# Altium PCB rev4mixer.PcbDoc
Units mm, origin at the board's own origin, x right, y up, seen from the top; angles counter-clockwise.
Board outline 35.05 x 30.1 mm, 2 copper layers (Top Layer, Bottom Layer), stack 0.53 mm thick; 13 components, 13 nets, 74 pads, 35 vias.
Unrouted connection lines stored in the file: 1.
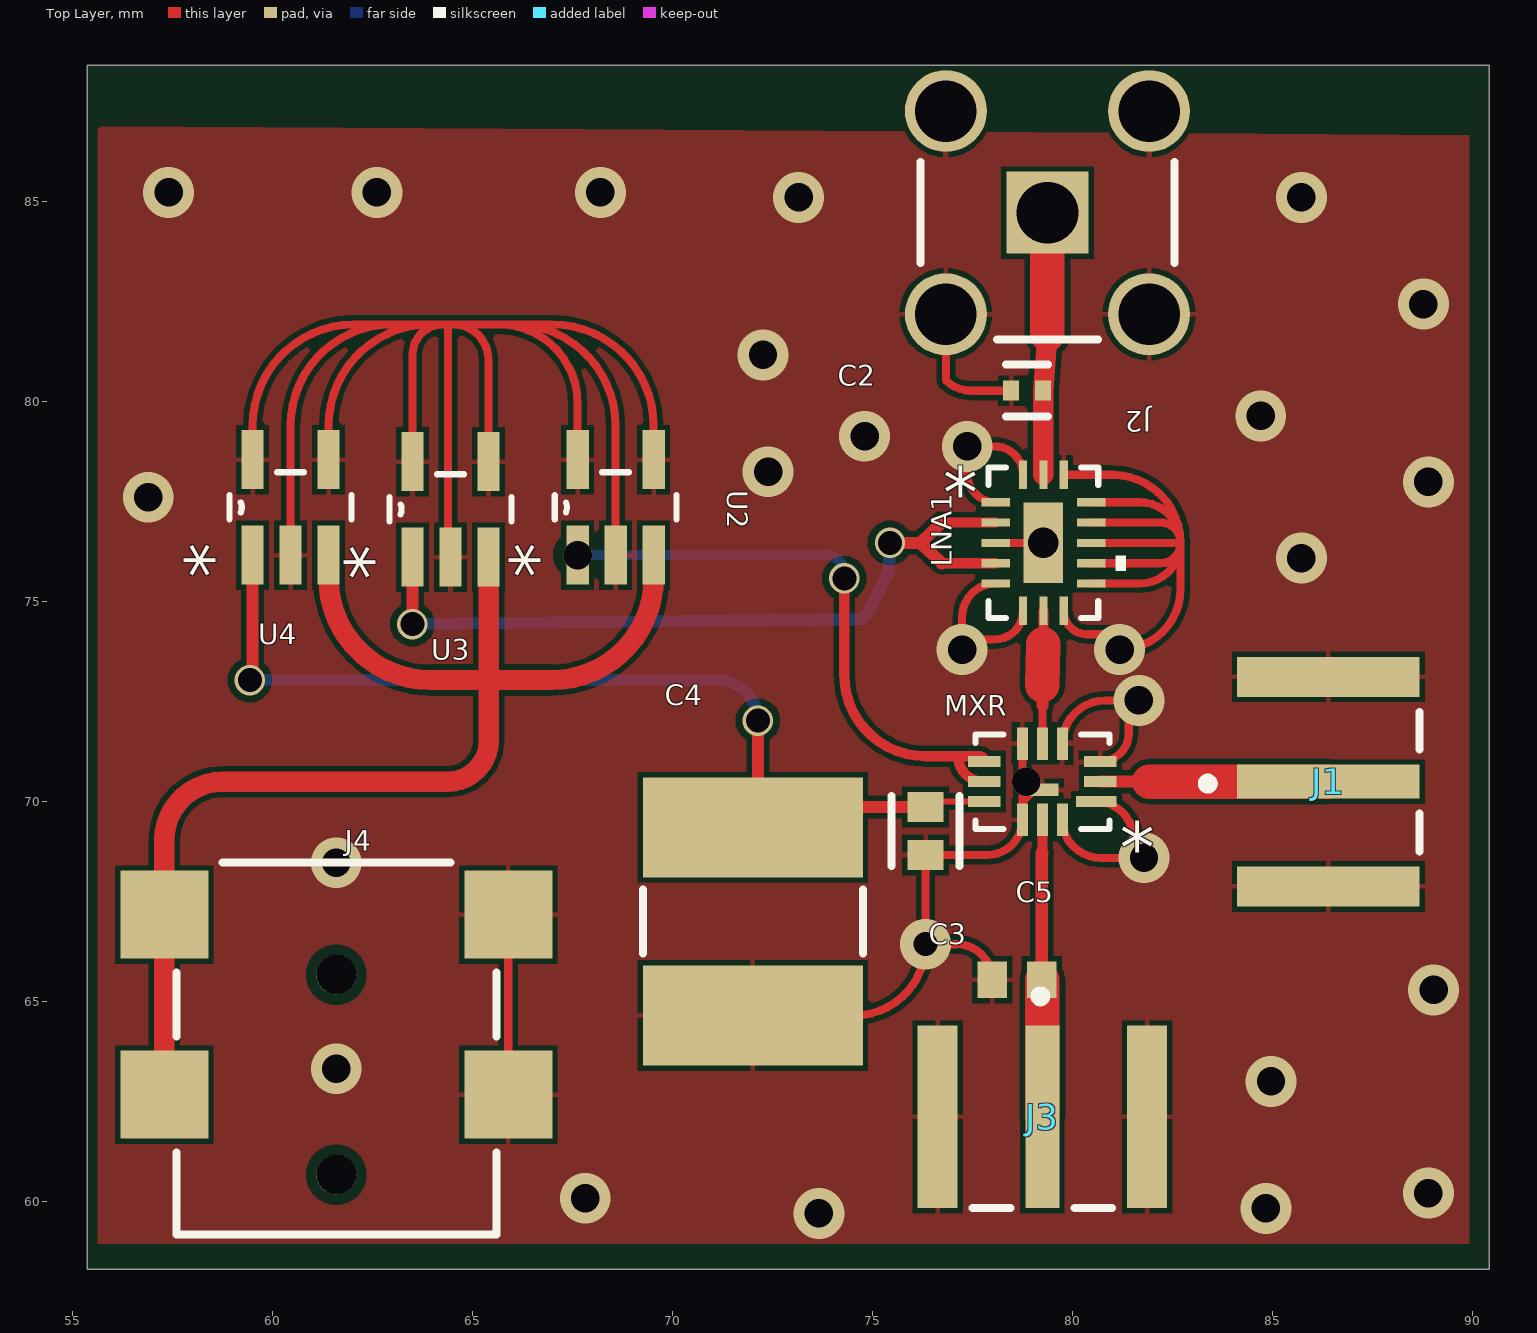
[diagram p0: Top Layer view]
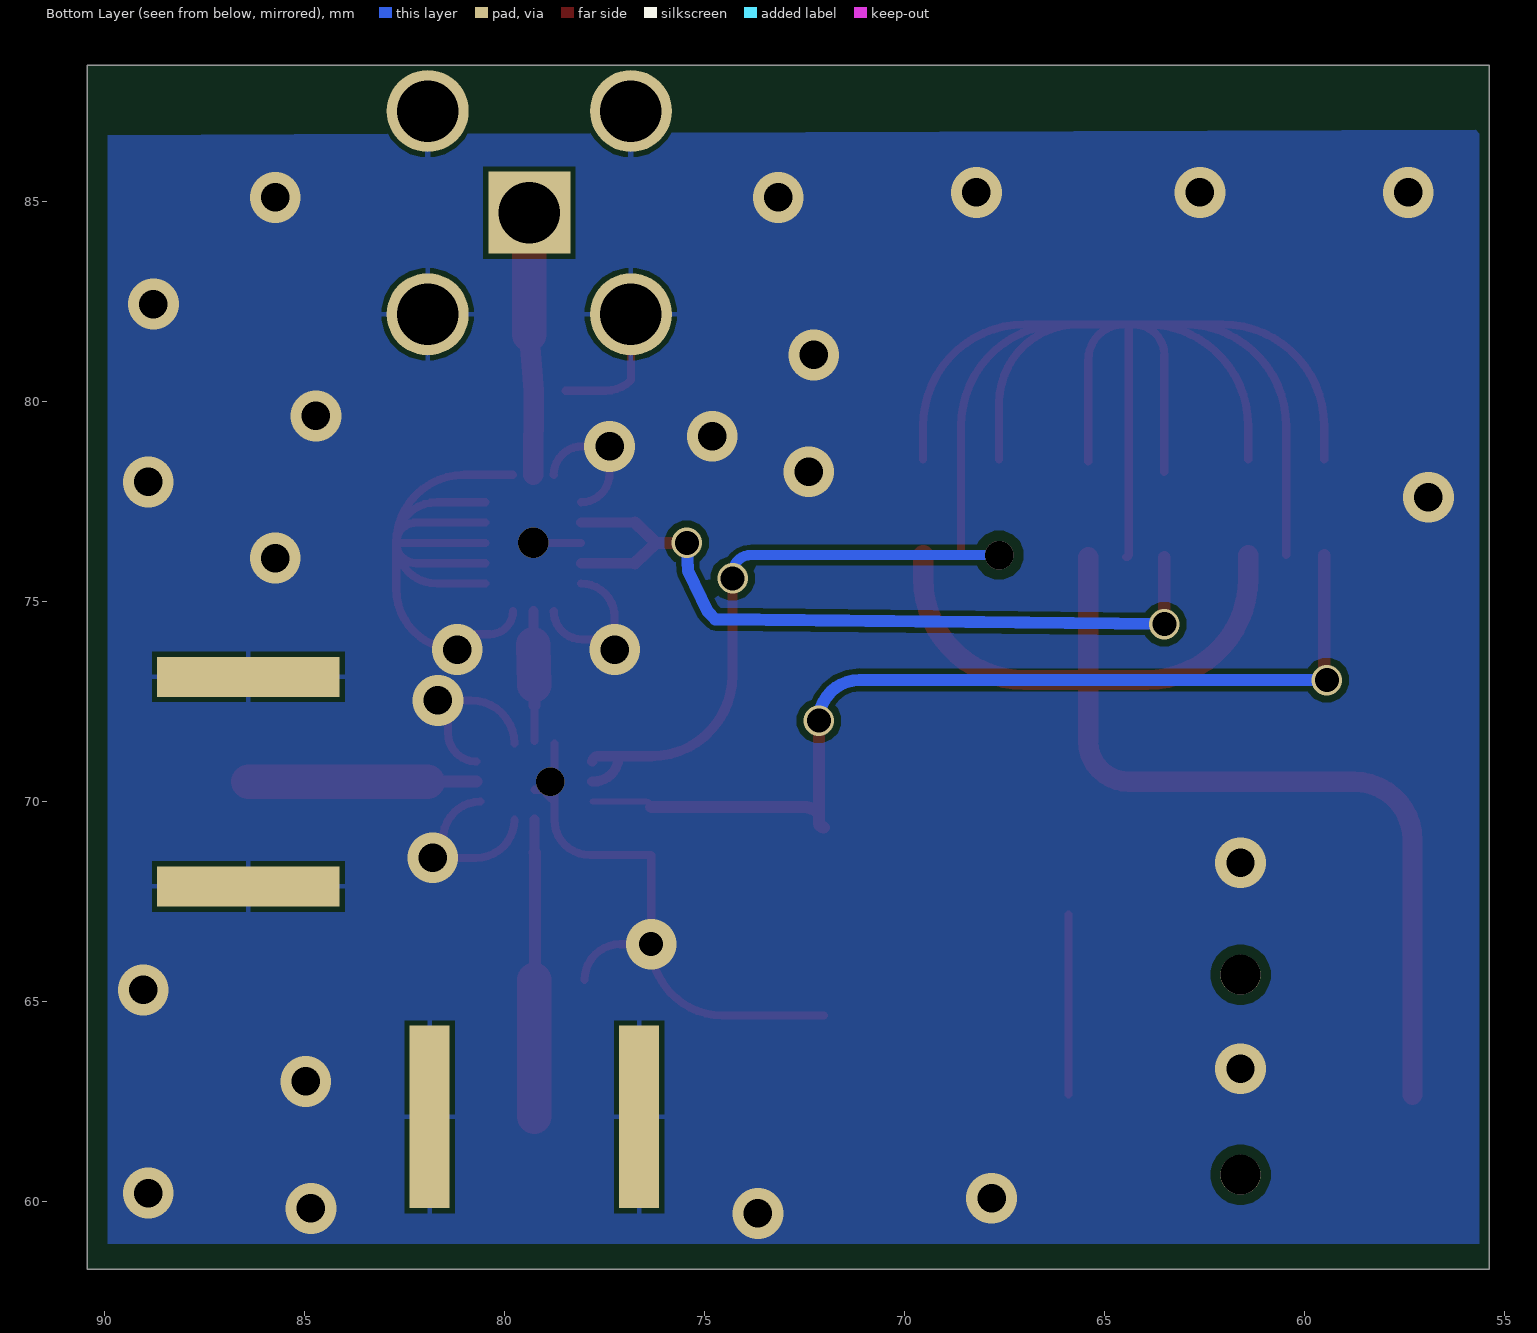
[diagram p1: Bottom Layer view, seen from below]
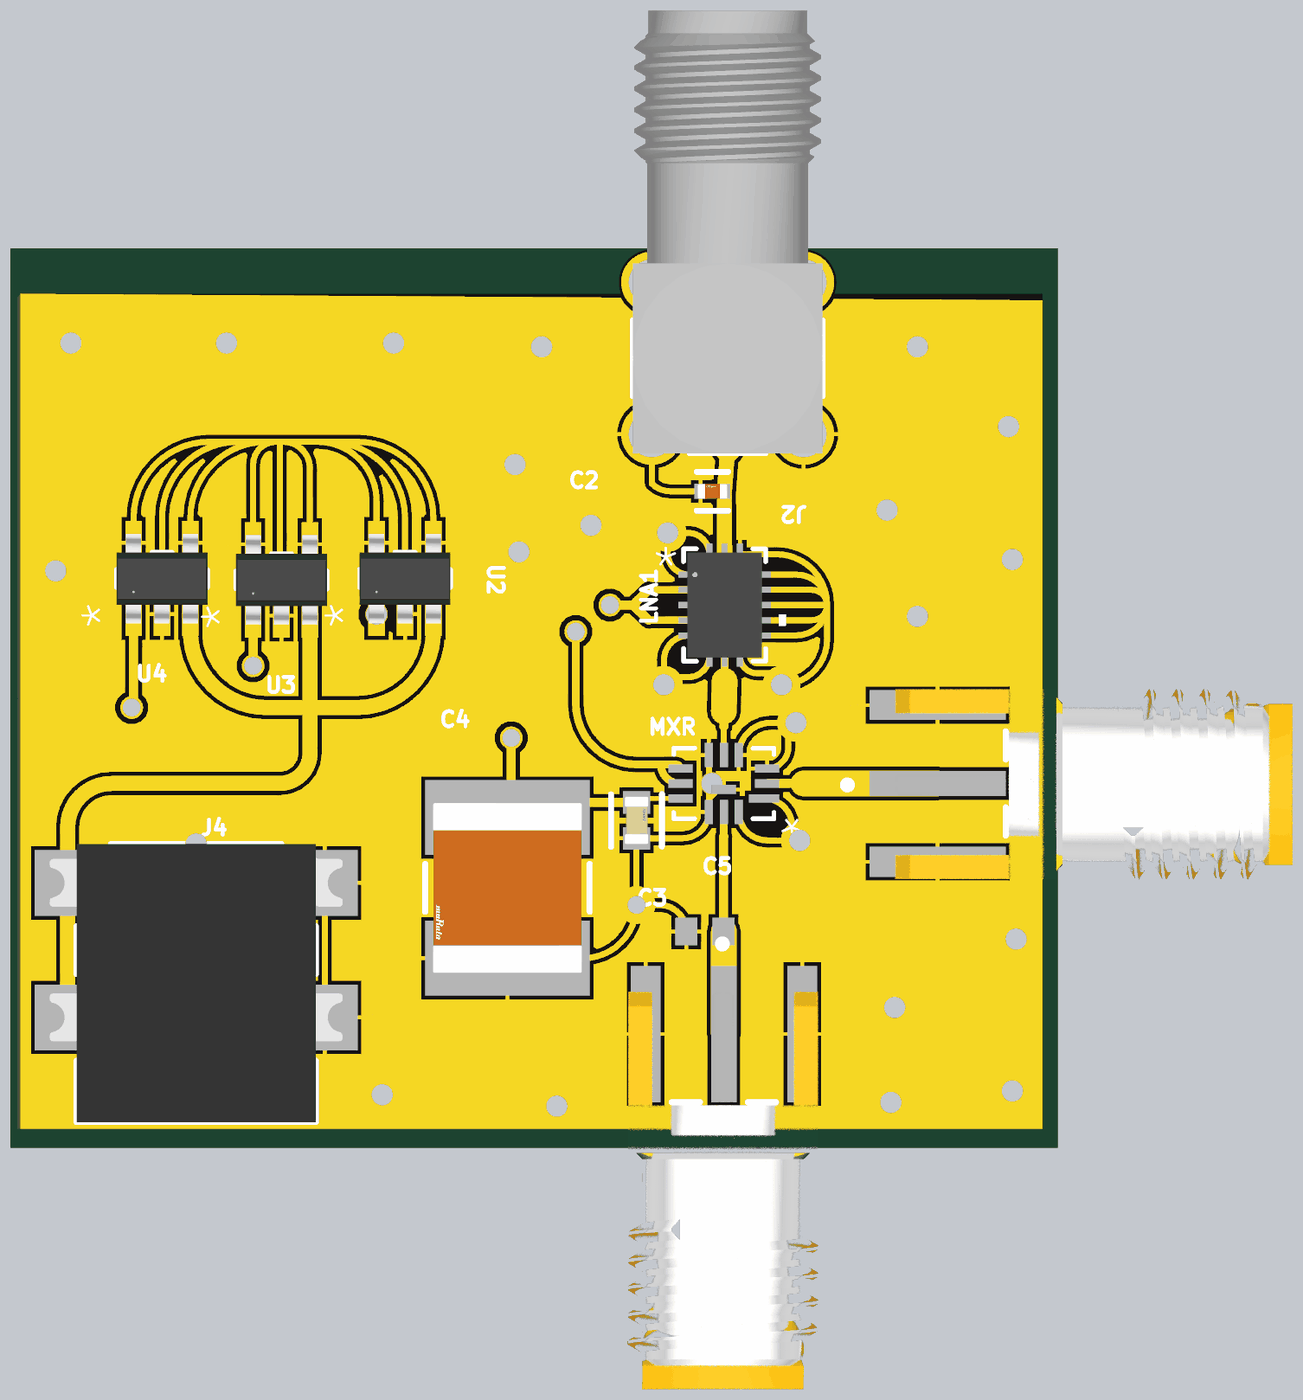
[diagram p2: 3D render of the assembled board from above, using the file's embedded part models]

## Layer stack, top to bottom
Top Solder: solder mask 0.0102, Solder Resist, Dk 3.5
Top Layer: signal copper 0.0152
Dielectric 1: core 0.4999, FR-4, Dk 4.8
Bottom Layer: signal copper 0.0152
Bottom Solder: solder mask 0.0102, Solder Resist, Dk 3.5

## Board outline
55.372,58.293 90.424,58.293 90.424,88.392 55.372,88.392

## Design rules (kind name [scope] priority, off if disabled: settings)
BoardOutlineClearance [All] p1: gap=0.2 ignorepadtopadclearanceinfootprint=FALSE
Clearance [All] p1: gap=0.127 ignorepadtopadclearanceinfootprint=FALSE except(0.25: Arc-Hole Track-Hole SMDPad-Hole THPad-Hole Via-Hole Fill-Hole Poly-Hole Region-Hole Text-Hole)
ComponentClearance [All] p1: gap=0.127 collisioncheckmode=3 verticalgap=0.127 showdistances=TRUE
DiffPairsRouting [All] p1: maxlimit=0.254 minlimit=0.127 mostfreqgap=0.127 toplayer_minwidth=0.127 toplayer_maxwidth=25.4 toplayer_prefwidth=0.127 bottomlayer_minwidth=0.127 bottomlayer_maxwidth=25.4 bottomlayer_prefwidth=0.127 maxuncoupledlength=12.7
Height [All] p1: minheight=0 maxheight=1816.048 prefheight=12.7
HoleSize [All] p1: absolutevalues=TRUE maxlimit=6.3 minlimit=0.3 maxpercent=80.000 minpercent=20.000
HoleToHoleClearance [All] p1: gap=0.25 allowstackedmicrovias=FALSE
MinimumAnnularRing [All] p1: minimumring=0.076
MinimumSolderMaskSliver [All] p1: minsoldermaskwidth=0
PlaneClearance [All] p1: clearance=0.127
PlaneConnect PlaneConnectPowerPads [InPadClass('PowerPads')] p1: planeconnectstyle=Direct reliefexpansion=0.508 reliefentries=4 reliefconductorwidth=0.254 reliefairgap=0.254
PlaneConnect [All] p2: pad.planeconnectstyle=Relief pad.reliefexpansion=0.3 pad.reliefentries=4 pad.reliefconductorwidth=0.127 pad.reliefairgap=0.127 via.planeconnectstyle=Direct via.reliefexpansion=0.3 via.reliefentries=4 via.reliefconductorwidth=0.127 via.reliefairgap=0.127
PolygonConnect PolygonConnectPowerPads [All vs (InPadClass('PowerPads'))] p1: connectstyle=Direct reliefconductorwidth=0.254 reliefentries=4 polygonreliefangle="90 Angle" airgapwidth=0.254
PolygonConnect [All] p2: thpad.connectstyle=Relief thpad.reliefconductorwidth=0.127 thpad.reliefentries=4 thpad.polygonreliefangle="90 Angle" thpad.airgapwidth=0.127 smdpad.connectstyle=Relief smdpad.reliefconductorwidth=0.127 smdpad.reliefentries=4 smdpad.polygonreliefangle="90 Angle" smdpad.airgapwidth=0.127 via.connectstyle=Direct via.reliefconductorwidth=0.127 via.reliefentries=4 via.polygonreliefangle="90 Angle" via.airgapwidth=0.127
RoutingVias [All] p1: holewidth=0.3 width=0.6 viastyle="Through Hole" minholewidth=0.3 minwidth=0.6 maxholewidth=0.6 maxwidth=6.6
SilkToSilkClearance [All] p1: silktosilkclearance=0
SilkToSolderMaskClearance [IsPad] p1: minsilkscreentomaskgap=0.127 clearancetoexposedcopper=TRUE
SolderMaskExpansion [All] p1: expansion=0.075 istentingtop=FALSE
Width [All] p1: maxlimit=25.4 minlimit=0.127 preferedwidth=0.127 minimp=50.000000 maximp=50.000000 favimp=50.000000
20 further rules are at their usual default settings.

## Classes and differential pairs
component class LNBF: C2 C3 C4 C5 J1 J2 J3 J4 LNA1 MXR

## Components (designator, comment, footprint, x,y, rotation, side; value= is the part's Value field where it differs from the comment)
C2 "GCQ1555C1HR15BB01D" FP-GCQ155-0_05-MFG 78.867,80.258 r180 top
C3 "C0603C220J5GACTU" FP-C0603C-CF-MFG 76.327,69.25 r270 top value="22 pF"
C4 "GRM55DR72E105KW01L" FP-GRM55D-0_4-IPC_A 72.009,66.992 r270 top
C5 "06032U150GAT2A" CAPC1508X91X25LL25T13 78.613,65.532 r0 top
J1 "OUT" FP-EMPCB_SMAFSTJ_B_HT-MFG 93.427,70.485 r270 top
J2 "SMA IN" MOLX-731000114_V 79.375,84.709 r270 top
J3 "EMPCB.SMAFSTJ.B.HT" FP-EMPCB_SMAFSTJ_B_HT-MFG 79.248,55.073 r180 top
J4 "694102107102" 694102107102 61.595,63.809 r0 top
LNA1 "PMA-183PLN+" JV2579_MNC 79.273,76.454 r0 top
MXR "LTC5549IUDB#TRMPBF" LTC5549IUDBTRMPBF_ADI 79.248,70.485 r180 top (schematic designator U1)
U2 "TLV70133DBVRM3" DBV5 68.58,77.343 r90 top
U3 "TLV70133DBVRM3" DBV5 64.45,77.292 r90 top
U4 "TLV70133DBVRM3" DBV5 60.452,77.343 r90 top

## Footprints (in the part's own frame and the unit in brackets; to place one, negate y for a bottom-side part, rotate by r counter-clockwise, add the part's x,y. Pads: shape width x height; smd on the part's side, far side on the other; paste and mask are expansions set on the pad)
694102107102 [mm] "DC Power Jack Right Angled Low Profile SMT ?3.9 with 4 soldering pads & pegs"
  rect 2.2x2.2 smd: 1(-4.3,-1.15) 1(-4.3,3.35) 2(4.3,-1.15) 3(4.3,3.35)
  round 1 hole 1 unplated: MH1(0,1.85) MH2(0,-3.15)
  silkscreen extent -4,-4.65 4,4.65, body extent -4.9,-4.65 4.9,4.65, height 5.32
CAPC1508X91X25LL25T13 [mm] "Chip Capacitor, 2-Leads, Body 1.52x0.76mm, IPC High Density"
  rect 0.74x0.92 smd: 1(-0.62,0) 2(0.62,0)
  body extent -0.88,-0.51 0.89,0.51, height 0.91
DBV5 [mil]
  rect 58x22 smd paste-29 mask-29: 1(-47,37.4) 2(-47,0) 3(-47,-37.4) 4(47,-37.4) 5(47,37.4)
  silkscreen extent -12,-60 34,60, body extent -59,-60 59,60, height 57
FP-C0603C-CF-MFG [mm]
  rect 0.75x0.9 smd paste+0 mask+0: 1(-0.6,0) 2(0.6,0)
  silkscreen extent -0.87,-0.85 0.88,0.85, body extent -1.2,-0.6 1.2,0.6, height 0.25
FP-EMPCB_SMAFSTJ_B_HT-MFG [mm]
  rect 0.85x4.56 smd paste+0 mask+0: 1(0,-7.03)
  rect 1x4.56 smd paste+0 mask+0: 2(-2.62,-7.03) 3(2.62,-7.03)
  rect 1x4.56 smd far side paste+0 mask+0: 4(-2.62,-7.03) 5(2.62,-7.03)
  silkscreen extent -1.74,-10.17 1.74,-4.75, body extent -3.32,-9.41 3.32,5.35, height 0.25
FP-GCQ155-0_05-MFG [mm]
  rect 0.4x0.5 smd paste+0 mask+0: 1(-0.4,0) 2(0.4,0)
  silkscreen extent -0.53,-0.65 0.53,0.65, body extent -0.7,-0.38 0.7,0.38, height 0.25
FP-GRM55D-0_4-IPC_A [mm]
  rect 2.502x5.503 smd paste+0 mask+0: 1(-2.35,0) 2(2.35,0)
  silkscreen extent -0.8,-2.75 0.8,2.75, body extent -4.1,-3.25 4.1,3.25, height 0.25
JV2579_MNC [mil]
  rect 28x8 smd paste+0 mask+0: 1(-47,40) 2(-47,20) 3(-47,0) 4(-47,-20) 5(-47,-40) 9(47,-40) 10(47,-20) 11(47,0) 12(47,20) 13(47,40)
  rect 8x28 smd paste+0 mask+0: 6(-20,-67) 7(0,-67) 8(20,-67) 14(20,67) 15(0,67) 16(-20,67)
  rect 39x79 smd paste+0 mask+0: 17(0,0)
  silkscreen extent -54,-74 81,74, body extent -49,-69 49,69, height 33
LTC5549IUDBTRMPBF_ADI [mil]
  rect 40x11 smd paste+0 mask+0: 1(-53,19.69)
  rect 32x11 smd paste+0 mask+0: 2(-57,0) 3(-57,-19.69) 7(57,-19.69) 8(57,0) 9(57,19.69)
  rect 11x32 smd paste+0 mask+0: 4(-19.69,-37.5) 5(0,-37.5) 6(19.69,-37.5) 10(19.69,37.5) 11(0,37.5) 12(-19.69,37.5)
  rect 32x12 smd paste+0 mask+0: 13(0,7.97)
  silkscreen extent -66,-47 66,47
MOLX-731000114_V [mm] "Connector, 5-Leads, Body 14.8x6.35mm, Pitch 2.54mm"
  rect 2.05x2.05 hole 1.54: 1(0,0)
  round 2.05 hole 1.54: 2(-2.54,2.54) 3(-2.54,-2.54) 4(2.54,-2.54) 5(2.54,2.54)
  silkscreen extent -1.26,-3.18 3.18,3.18, body extent -11.62,-3.17 3.18,3.18, height 9.57

## Part data
C2: library part CMP-06035-056453-1, "High Q Ceramic Capacitor for Automotive 0.15pF ±0.1pF 50VDC C0G 0402 Paper T/R"
C3: library part CMP-2006-03119-3, "Cap Ceramic 22pF 50V C0G 5% SMD 0603 125°C Paper T/R", Capacitance="22 pF", Manufacturer=KEMET, Package=C0603C-CF, Temperature="-55°C to +125°C", Temperature Characteristic=C0G, Temperature Coefficient=30ppm/°C, Temperature Range High=+125°C, Temperature Range Low=-55°C, Tolerance=0.05, Voltage Rating="50 V", Automotive=Yes, Automotive Grade="Grade 1", Category=Cap, ComponentLink2Description=Datasheet, ComponentLink2URL=https://api.kemet.com/component-edge/download/datasheet/C0603C100J5GACAUTO.pdf, Device Class L1="Passive Components", Device Class L2=Capacitors, Device Class L3="Ceramic Capacitors", Digikey Description="Cap Ceramic 22pF 50V C0G 5% SMD 0603 125°C Paper T/R", Height=0.87mm, Lead Free=Yes, Manufacturer Part Number=C0603C220J5GACTU, Material=Ceramic, Mouser Description="Cap Ceramic 22pF 50V C0G 5% SMD 0603 125°C Paper T/R", Octopart=https://octopart.com/c0603c220j5gactu-kemet-98525, RoHS=TRUE
C4: library part CMP-2000-06370-2, "Chip Multilayer Ceramic Capacitors for General Purpose, 2220, 1.0uF, X7R, 15%, 10%, 250V", Capacitance=1uF, Case Code (Imperial)=2220, Case Code (Metric)=5750, Dielectric=X7R, Max Operating Temperature=125°C, Min Operating Temperature=-55°C, Package Quantity=1, Tolerance=10%, Voltage=250V, Case/Package=2220, Depth=5mm, Height=2mm, Lead Free="Lead Free", Length=5.7mm, Material=Ceramic, Mount="Surface Mount", Number of Pins=2, Packaging="Tape and Reel", REACH SVHC="No SVHC", Termination=SMD/SMT, Thickness=0.087inch, Voltage Rating=250V, Voltage Rating (DC)=250V, Width=5mm
C5: library part CMP-2006-04659-1, Manufacturer="AVX Interconnect / Elco", Part Number=06032U150GAT2A
J1: library part CMP-111093-000001-1, "CONN SMA JACK STR 50OHM EDGE MNT", Frequency=12.4GHz, Manufacturer="Taoglas Limited", Manufacturer Part Number=EMPCB.SMAFSTJ.B.HT, Package=0, Temperature="-40°C to +85°C", Temperature Range High=+85°C, Temperature Range Low=-40°C, Voltage Rating=335V, Automotive=No, Category=Conn, ComponentLink2Description=Datasheet, ComponentLink2URL=https://cdn.taoglas.com/datasheets/EMPCB.SMAFSTJ.B.HT.pdf, Conn Orientation=Horizontal, Contact Material=Gold, Device Class L1=Connectors, Device Class L2="RF / Coaxial Connectors", Device Class L3=unset, Digikey Description="CONN SMA JACK STR 50OHM EDGE MNT", Impedance=50Ω, Is Female=yes, Lead Free=Yes, Mouser Description="RF Connectors / Coaxial Connectors SMA Straight Edge Mount PCB Jack-Gold", Number Of Contacts=1, Octopart=https://octopart.com/empcb.smafstj.b.ht-taoglas-24204431, Pitch=2.62mm, RoHS=TRUE
J2: library part CMP-2000-05487-1, "SMA Right-Angle PCB Jack Receptacle, Brass Body, Gold Plated, 50 Ohm, 5-Pin THD, RoHS, Tray", Manufacturer=Molex, Package Description="5-Pin Through Hole Device, Body 14.8 x 6.35 mm, Pitch 2.54 mm", Package Reference=731000114, Datasheet URL=http://www.molex.com/webdocs/datasheets/pdf/en-us/0731000114_RF_COAX_CONNECTORS.pdf, Datasheet Version=09/2016, Manufacturer URL=http://www.molex.com/, Mounting Technology=ThroughHole, Package URL=http://www.molex.com/pdm_docs/sd/731000114_sd.pdf
J3: library part CMP-111093-000001-1, "CONN SMA JACK STR 50OHM EDGE MNT", Frequency=12.4GHz, Manufacturer="Taoglas Limited", Package=0, Temperature="-40°C to +85°C", Temperature Range High=+85°C, Temperature Range Low=-40°C, Voltage Rating=335V, Automotive=No, Category=Conn, ComponentLink2Description=Datasheet, ComponentLink2URL=https://cdn.taoglas.com/datasheets/EMPCB.SMAFSTJ.B.HT.pdf, Conn Orientation=Horizontal, Contact Material=Gold, Device Class L1=Connectors, Device Class L2="RF / Coaxial Connectors", Device Class L3=unset, Digikey Description="CONN SMA JACK STR 50OHM EDGE MNT", Impedance=50Ω, Is Female=yes, Lead Free=Yes, Manufacturer Part Number=EMPCB.SMAFSTJ.B.HT, Mouser Description="RF Connectors / Coaxial Connectors SMA Straight Edge Mount PCB Jack-Gold", Number Of Contacts=1, Octopart=https://octopart.com/empcb.smafstj.b.ht-taoglas-24204431, Pitch=2.62mm, RoHS=TRUE
J4: library part CMP-1502-00174-2, Color=Black, Current Rating=5A, Flammability Rating="UL94 V-0", Insulation Resistance=100MΩ, Max Operating Temperature=85°C, Min Operating Temperature=-40°C, Operating Supply Voltage=18V, Connector Type=Power, Contact Gender=Female, Contact Plating=Tin, Gender=Male, Housing Material=Polyamide, Mount="Surface Mount", NexarPartId=52645180, Packaging="Tape and Reel", REACH SVHC=Unknown, RoHS=Compliant, Shielding=Unshielded, Termination=SMD/SMT, Voltage Rating=18V, Voltage Rating (DC)=18V
LNA1: "No Description Available", Mfr_Name="Mini Circuits", Copyright="Copyright (C) 2024 Ultra Librarian. All rights reserved.", Manufacturer_Part_Number=PMA-183PLN+, RefDes=RefDes, Type=DEV
MXR: library part LTC5549IUDBTRMPBF, "No Description Available", Mfr_Name="Analog Devices Inc", Copyright="Copyright (C) 2024 Ultra Librarian. All rights reserved.", Manufacturer_Part_Number=LTC5549IUDB#TRMPBF, RefDes=RefDes, Type=DEV
U2 U3 U4: "No Description Available", Mfr_Name="Texas Instruments", Copyright="Copyright (C) 2024 Ultra Librarian. All rights reserved.", Manufacturer_Part_Number=TLV70133DBVRM3, RefDes=RefDes, Type=DEV

## Via types
v1: diameter 1.27, hole 0.711, Top Layer to Bottom Layer, 26 vias
v2: diameter 0.762, hole 0.6, Top Layer to Bottom Layer, 5 vias
v3: diameter 0.711, hole 0.711, Top Layer to Bottom Layer, 2 vias
v4: diameter 0.762, hole 0.762, Top Layer to Bottom Layer, 1 vias
v5: diameter 1.27, hole 0.6, Top Layer to Bottom Layer, 1 vias

## Nets (pads, with @x,y where several pads share a name; then routed paths per layer and width w, separated by ;. In a path a pad name is that pad's centre, name@x,y a point inside that pad or via, vN(x,y) a via of type N, cw(c..) or ccw(c..) an arc to the next point about the centre after c; other vN are vias at no path point)
GND: C2.2 C3.2 C4.2 C5.1 J1.2 J1.3 J1.4 J1.5 J2.2 J2.3 J2.4 J2.5 J3.2 J3.3 J3.4 J3.5 J4.2 J4.3 LNA1.1 LNA1.3 LNA1.5 LNA1.6 LNA1.8 LNA1.9 LNA1.10 LNA1.11 LNA1.12 LNA1.13 LNA1.14 LNA1.16 LNA1.17 MXR.1 MXR.3 MXR.4 MXR.6 MXR.10 MXR.12 MXR.13 U2.2 U2.4 U2.5 U3.2 U3.4 U3.5 U4.2 U4.4 U4.5 | length 118.3
  Top Layer w0.203: U4.5 59.502,79.375 cw(c62.042,79.375) 62.042,81.915 62.992,81.915 ; U4.2 60.452,79.375 cw(c62.992,79.375) 62.992,81.915 ; U4.4 61.402,79.375 cw(c63.942,79.375) 63.942,81.915 ; U3.5@63.5,78.232 U3.5 63.5,81.153 cw(c64.262,81.153) 64.262,81.915 ; U3.2 cw(c64.45,76.159) 64.389,76.159 64.389,81.915 ; U3.4 65.4,81.031 ccw(c64.516,81.031) 64.516,81.915 ; J4.2 J4.3 ; U2.5 67.63,79.944 ccw(c65.659,79.944) 65.659,81.915 ; U2.2 68.58,79.375 ccw(c66.04,79.375) 66.04,81.915 ; U2.4 69.53,79.375 ccw(c66.99,79.375) 66.99,81.915 66.04,81.915 ; C4.2 74.547,64.641 ccw(c74.547,66.421) v5(76.327,66.421) ; J2.4 76.835,80.518 ccw(c77.463,81.146) 77.463,80.258 C2.2 ; v1(77.241,73.787) 77.241,74.6 cw(c78.08,74.6) LNA1.5 ; v1@77.622,74.041 78.054,74.041 ; C5.1 ccw(c77.104,65.532) 77.104,66.421 v5(76.327,66.421) ; LNA1.3 v4(79.273,76.454) ; LNA1.1 cw(c78.08,78.181) 77.368,78.181 v1(77.368,78.867) 78.054,78.867 cw(c78.054,78.156) LNA1.16 ; MXR.6 78.748,69.985 ; v3(78.847,70.485) 78.893,70.438 MXR.13@78.893,70.13 ; MXR.13 78.994,70.283 78.943,70.232 78.943,70.18 MXR.13@78.893,70.13 ; MXR.12 ccw(c80.701,69.532) 80.701,68.58 v1(81.788,68.58) ; MXR.4 cw(c80.828,71.438) 80.828,72.517 v1(81.661,72.517) ; LNA1.14 81.001,78.156 cw(c81.001,76.454) 82.702,76.454 ; LNA1.9 81.686,75.438 ccw(c81.686,76.454) 82.702,76.454 ; LNA1.10 82.194,75.946 ccw(c82.194,76.454) 82.702,76.454 ; LNA1.11 82.702,76.454 ; LNA1.12 82.194,76.962 cw(c82.194,76.454) 82.702,76.454 ; LNA1.13 81.686,77.47 cw(c81.686,76.454) 82.702,76.454 ; MXR.3 ccw(c80.696,71.696) 80.732,70.986 ccw(c80.696,71.696) 81.407,71.696 v1@81.407,72.39 ; v1@81.051,74.168 80.366,74.168 ; v1(81.178,73.787) ccw(c81.178,75.311) 82.702,75.311 82.702,76.454 ; v1@81.534,68.834 v1@81.534,69.045 ; 62.992,81.915 63.942,81.915 ; 63.942,81.915 64.262,81.915 ; 64.262,81.915 64.389,81.915 ; 64.389,81.915 64.516,81.915 ; 64.516,81.915 65.659,81.915 ; 65.659,81.915 66.04,81.915 ; v5(76.327,66.421) C3.2 77.865,68.65 ccw(c77.865,69.532) MXR.10 78.748,69.985 ; 78.054,74.041 ccw(c78.054,74.752) LNA1.6 cw(c78.054,74.752) 78.665,74.388 cw(c78.054,74.752) 78.054,74.041 ; 78.748,69.985 MXR.13@78.893,70.13 ; 80.366,74.168 cw(c80.366,74.752) LNA1.8 ccw(c80.366,74.752) 80.366,74.168 ; v1@81.534,69.045 ccw(c80.594,69.045) MXR.1 cw(c80.594,69.045) v1@81.534,69.045
  other v1: 73.66,59.69 84.836,59.817 67.818,60.071 88.9,60.198 84.963,62.992 61.595,63.309 89.027,65.278 61.595,68.459 85.725,76.073 56.896,77.597 88.9,77.978 72.39,78.232 74.803,79.121 84.709,79.629 72.263,81.153 88.773,82.423 73.152,85.09 85.725,85.09 57.404,85.217 62.611,85.217 68.199,85.217
NetC1_1: 
NetC2_1: LNA1.7 MXR.5 | length 3.3
  Top Layer w0.203: MXR.5@79.248,71.501 79.248,72.39
  Top Layer w0.254: 79.273,73.914 LNA1.7
  Top Layer w0.305: 79.248,72.39 79.248,72.898
  Top Layer w0.863: 79.248,72.898 79.273,73.914
NetC5_2: C5.2 J3.1 MXR.11 | length 7.4
  Top Layer w0.254: 79.248,68.707 MXR.11
  Top Layer w0.305: C5.2 79.233,68.707 79.248,68.707
  Top Layer w0.863: J3.1 C5.2@79.248,65.532
NetC8_2: 
NetJ1_1: C2.1 J1.1 J2.1 LNA1.15 MXR.2 | length 12.3
  Top Layer w0.305: MXR.2 81.915,70.485
  Top Layer w0.508: LNA1.15 C2.1 79.375,81.661
  Top Layer w0.863: 79.375,81.661 J2.1 ; 81.915,70.485 J1.1
NetJ4_1: J4.1 U2.3 U3.3 U4.3 | length 32.2
  Top Layer w0.508: J4.1@57.295,62.659 57.295,67.159 57.295,69.021 cw(c58.759,69.021) 58.759,70.485 64.389,70.485 ccw(c64.389,71.501) 65.405,71.501 65.405,73.025 66.99,73.025 ccw(c66.99,75.565) 69.53,75.565 U2.3 ; U4.3 61.402,75.565 ccw(c63.942,75.565) 63.942,73.025 65.086,73.025 ; U3.3 65.405,76.098 65.405,73.164
NetJ5_2: 
NetLNA1_2: LNA1.2 LNA1.4 U3.1 | length 19.9
  Top Layer w0.254: 76.733,75.946 LNA1.4 ; 76.733,76.962 LNA1.2
  Top Layer w0.305: v2(63.5,74.422) U3.1 ; v2(75.438,76.454) 76.078,76.454 76.2,76.454 ; 76.733,75.946 76.2,76.454 ; 76.733,76.962 76.2,76.454
  Bottom Layer w0.305: v2(63.5,74.422) 74.726,74.547 74.903,74.724 75.407,75.756 v2(75.438,76.454)
NetLNA1_7: 
NetU1_7: MXR.7 MXR.8 U2.1 | length 15.2
  Top Layer w0.254: v2(74.295,75.565) 74.295,73.152 ccw(c76.327,73.152) 76.327,71.12 77.14,71.12 ; MXR.8 77.775,70.485 cw(c77.775,71.12) 77.14,71.12 ; MXR.7 ccw(c77.665,70.985) 77.665,71.12 77.14,71.12
  Bottom Layer w0.254: v3(67.63,76.149) 73.838,76.149 cw(c73.838,75.692) 74.295,75.692 v2(74.295,75.565)
NetU2_3: 
VCC: C3.1 C4.1 MXR.9 U4.1 | length 25
  Top Layer w0.152: C3.1 cw(c76.462,69.85) 76.462,69.985 MXR.9
  Top Layer w0.305: v2(59.436,73.025) 59.436,73.152 ccw(c59.436,73.218) 59.502,73.218 U4.1 ; C4.1 ccw(c72.009,69.469) 72.136,69.469 C4.1@72.136,69.678 ; v2(72.136,72.009) C4.1@72.136,69.678 ; C3.1 72.517,69.85 ccw(c72.517,69.342) C4.1@72.136,69.678
  Bottom Layer w0.305: v2(59.436,73.025) 71.12,73.025 cw(c71.12,72.009) v2(72.136,72.009)
pads on no net: J4.MH1 J4.MH2

## Polygon pours and split planes (outlines as drawn)
GND on Top Layer "GND_L01_P000" (solid, pour order 0): 55.626,86.868 55.626,58.928 89.916,58.928 89.916,86.65
GND on Bottom Layer "GND_L02_P001" (solid, pour order 1): 55.626,86.778 55.626,58.928 89.916,58.928 89.916,86.65

## Silkscreen, mask and mechanical layers (free items; w line width, h text height)
Top Solder:
  rectangle: 55.716,58.928 89.916,86.867
Bottom Solder:
  rectangle: 55.626,58.801 90.043,86.688

## Text inside footprints (layer, text, board x,y; h text height)
LNA1: Top 3D Body "*" at 78.118,77.089 h1.27; Top Overlay "*" at 76.772,77.089 h1.27
MXR: Top 3D Body "*" at 80.607,71.209 h1.27 r180; Top Overlay "*" at 82.055,69.989 h1.27 r180
U2: Top 3D Body "*" at 67.198,75.578 h1.27 r90; Top Overlay "*" at 67.198,75.578 h1.27 r90
U3: Top 3D Body "*" at 63.068,75.527 h1.27 r90; Top Overlay "*" at 63.068,75.527 h1.27 r90
U4: Top 3D Body "*" at 59.07,75.578 h1.27 r90; Top Overlay "*" at 59.07,75.578 h1.27 r90